# EAGLE board cRIO Breakout (EAGLE 5.11)
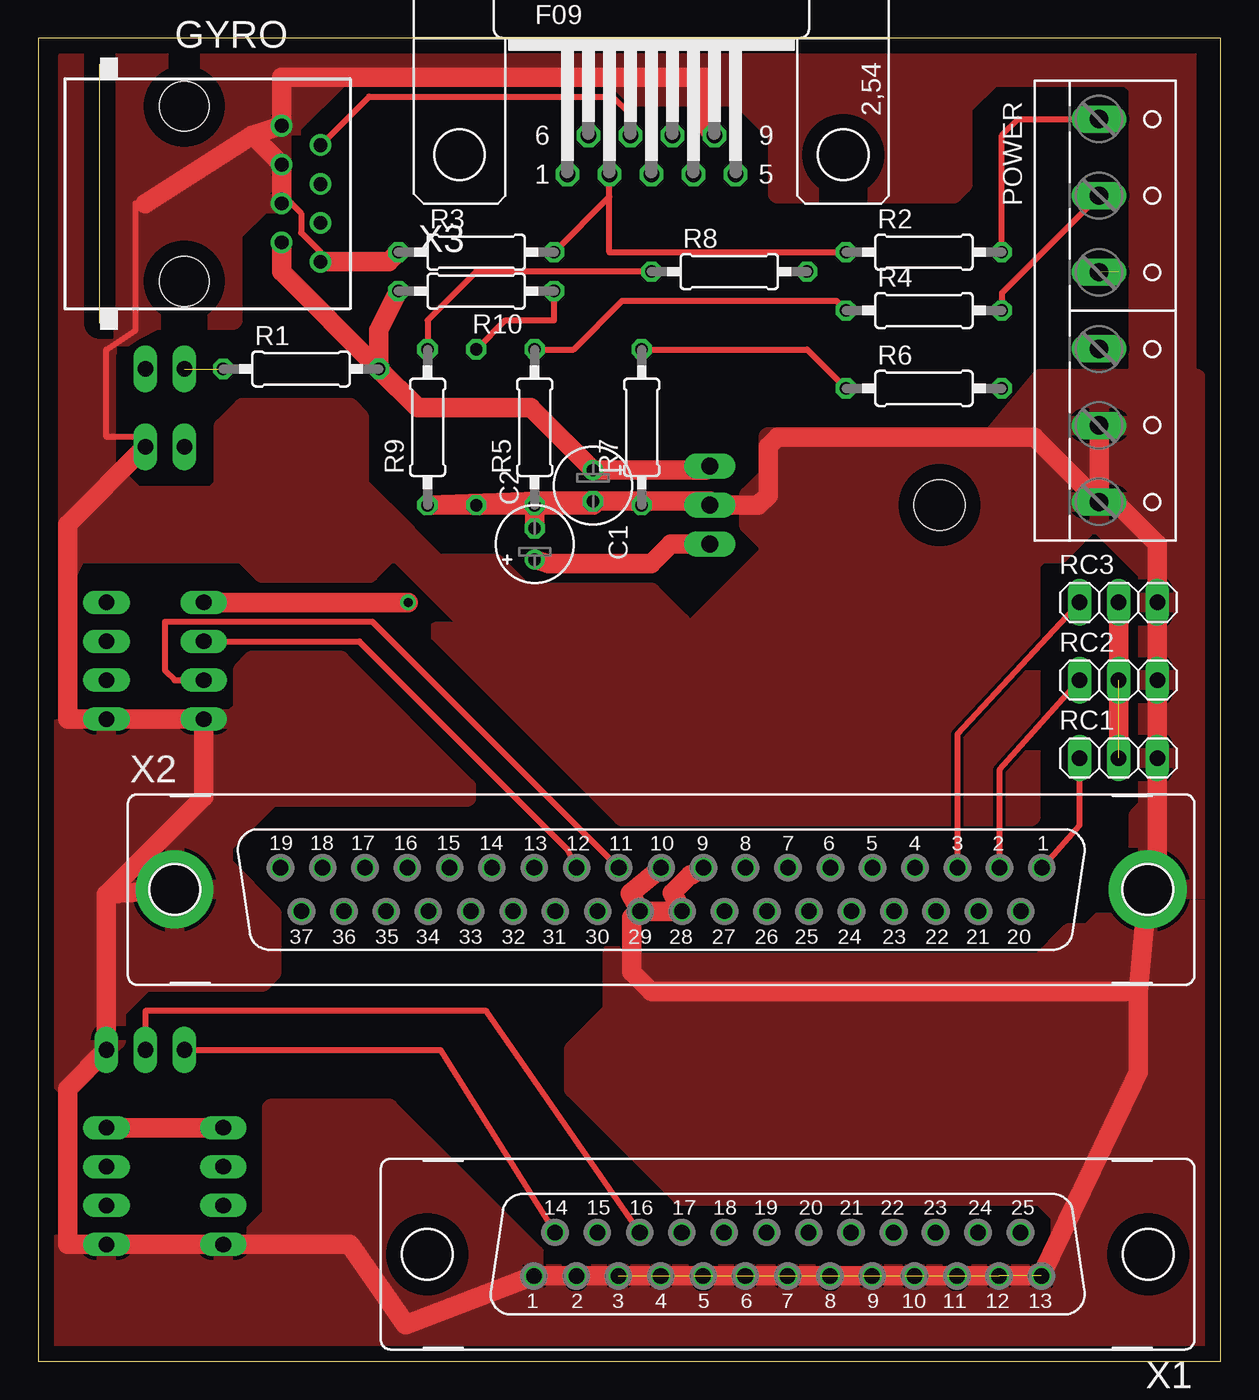
[diagram p0: board, top side]
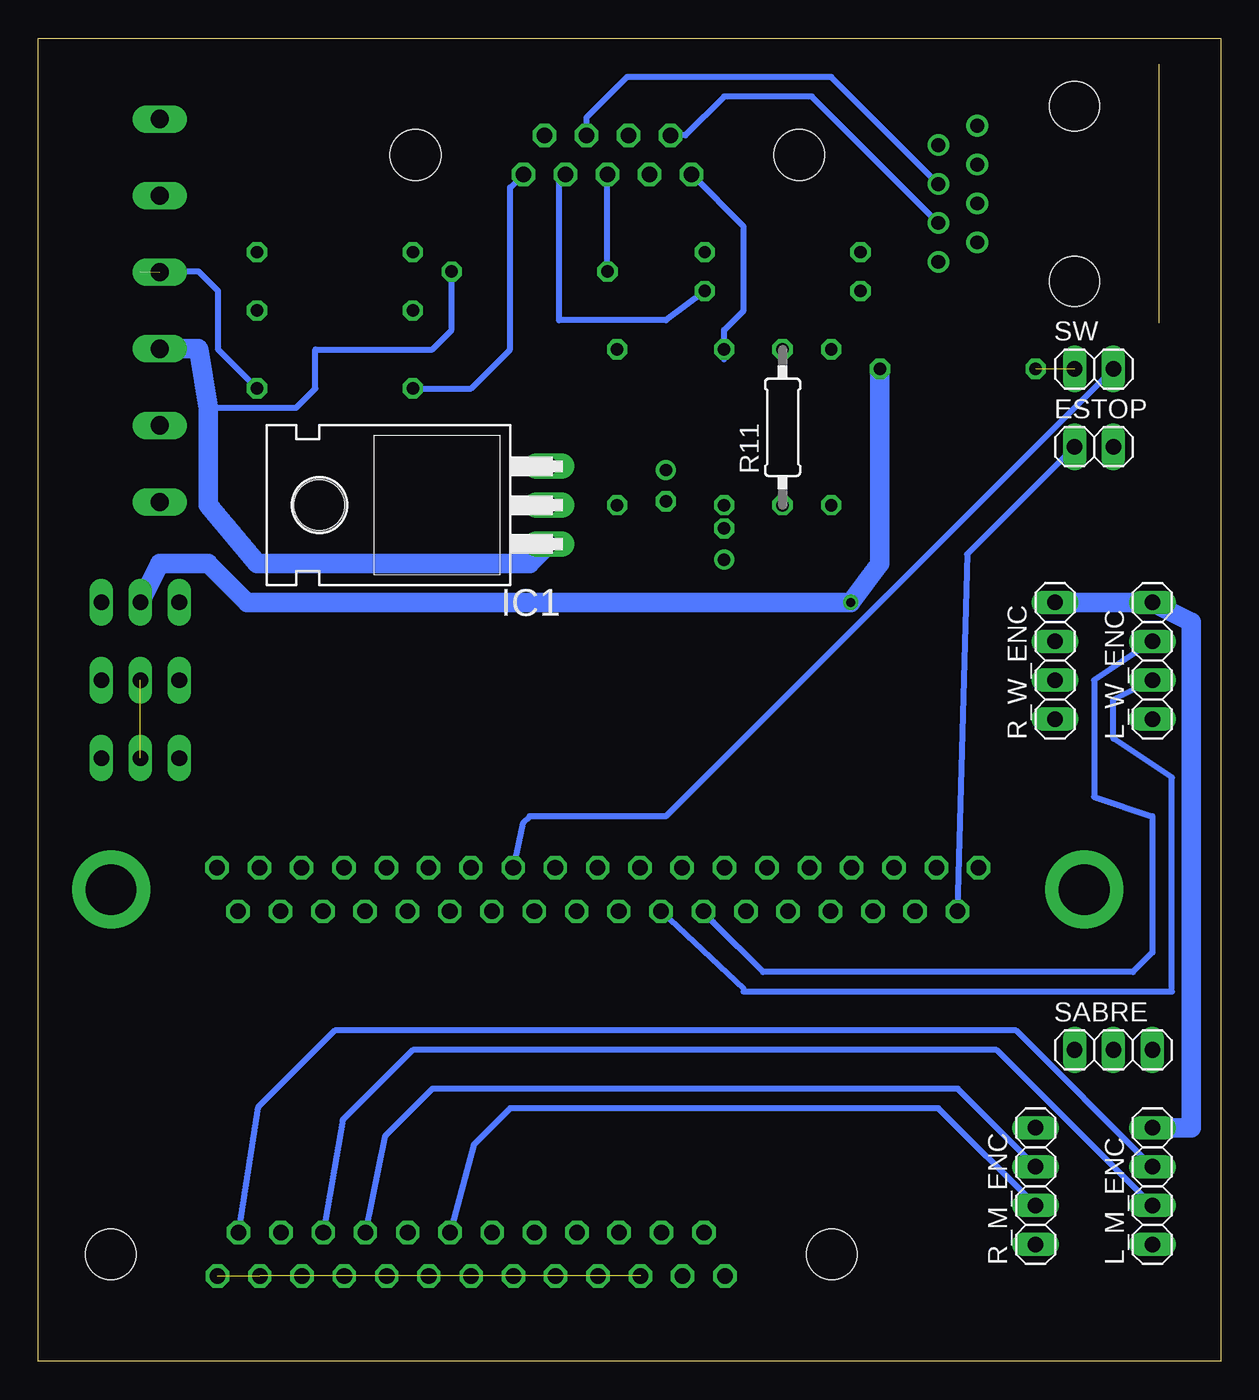
[diagram p1: board, bottom side, seen from below]

Size 77.14 x 86.35 mm. Coordinates in mm from the lower left corner, seen from the top.
Outline: 0,0 77.14,0 77.14,86.35 0,86.35 0,0
Copper layers (1*16): Top 0.035mm / dielectric 1.5mm / Bottom 0.035mm
Design rules "default *": minimum track width 10mil, minimum drill 0.5994mm, track to track 8mil, track to pad 8mil, pad to pad 8mil, via to via 8mil, smd to smd 0mil, copper to edge 40mil, drill to drill 8mil, minimum pad ring 10mil, minimum via ring 8mil, stop-mask expansion 4mil, vias tented up to drill 0mil, thermal gap 10mil

## Footprints (pad centres in the part's own frame; a part is rotated, then mirrored left to right if it is on the bottom)
E2-5 = drill 0.813 pad 1.27 round: + -1.016,0 | drill 0.813 pad 1.27 octagon: - 1.016,0
1X02 = drill 1.016 long: 1 -1.27,0; 2 1.27,0
RJ45-NO-SHIELD = drill 0.9 pad 1.4 round: 1 -4.445,6.35; 2 -3.175,8.89; 3 -1.905,6.35; 4 -0.635,8.89; 5 0.635,6.35; 6 1.905,8.89; 7 3.175,6.35; 8 4.445,8.89 | hole 3.251: -5.715,0; 5.715,0
TO220H = drill 1.118 long: 1 -2.54,-10.16; 2 0,-10.16; 3 2.54,-10.16 | hole 3.302: 0,4.826
1X04 = drill 1.016 long: 1 -3.81,0; 2 -1.27,0; 3 1.27,0; 4 3.81,0
W237-6 = drill 1.194 long: 1 -12.5,-1.27; 2 -7.5,-1.27; 3 -2.5,-1.27; 4 2.5,-1.27; 5 7.5,-1.27; 6 12.5,-1.27
0207/10 = drill 0.813 octagon: 1 -5.08,0; 2 5.08,0
1X03 = drill 1.016 long: 1 -2.54,0; 2 0,0; 3 2.54,0
F25V = drill 1.016 octagon: 1 16.561,1.422; 2 13.792,1.422; 3 11.049,1.422; 4 8.28,1.422; 5 5.512,1.422; 6 2.769,1.422; 7 0,1.422; 8 -2.769,1.422; 9 -5.512,1.422; 10 -8.28,1.422; 11 -11.049,1.422; 12 -13.792,1.422; 13 -16.561,1.422; 14 15.189,-1.422; 15 12.421,-1.422; 16 9.652,-1.422; 17 6.909,-1.422; 18 4.14,-1.422; 19 1.372,-1.422; 20 -1.372,-1.422; 21 -4.14,-1.422; 22 -6.909,-1.422; 23 -9.652,-1.422; 24 -12.421,-1.422; 25 -15.189,-1.422 | hole 3.302: 23.52,0; -23.52,0
F37VP = drill 1.016 octagon: 1 24.841,1.422; 2 22.073,1.422; 3 19.329,1.422; 4 16.561,1.422; 5 13.792,1.422; 6 11.049,1.422; 7 8.28,1.422; 8 5.512,1.422; 9 2.769,1.422; 10 0,1.422; 11 -2.769,1.422; 12 -5.512,1.422; 13 -8.28,1.422; 14 -11.049,1.422; 15 -13.818,1.422; 16 -16.561,1.422; 17 -19.329,1.422; 18 -22.098,1.422; 19 -24.841,1.422; 20 23.47,-1.422; 21 20.701,-1.422; 22 17.932,-1.422; 23 15.189,-1.422; 24 12.421,-1.422; 25 9.652,-1.422; 26 6.909,-1.422; 27 4.14,-1.422; 28 1.372,-1.422; 29 -1.372,-1.422; 30 -4.14,-1.422; 31 -6.909,-1.422; 32 -9.677,-1.422; 33 -12.421,-1.422; 34 -15.189,-1.422; 35 -17.958,-1.422; 36 -20.701,-1.422; 37 -23.47,-1.422 | drill 3.302 pad 5.08 round: G1 -31.75,0; G2 31.75,0
F09H = drill 1.016 octagon: 1 -5.486,-1.27; 2 -2.743,-1.27; 3 0,-1.27; 4 2.743,-1.27; 5 5.486,-1.27; 6 -4.115,1.27; 7 -1.372,1.27; 8 1.372,1.27; 9 4.115,1.27 | hole 3.302: -12.522,0; 12.522,0

## Placement (x,y rotation side)
C1  10u  [E2-5]  36.2,57.15 270 top
C2  10u  [E2-5]  32.38,53.34 90 top
ESTOP  [1X02]  8.26,59.69 0 bottom
GYRO  RJ45-8L-B  [RJ45-NO-SHIELD]  9.53,76.2 270 top
IC1  7805T  [TO220H]  53.98,55.88 90 bottom
L_M_ENC  [1X04]  4.45,11.43 90 bottom
L_W_ENC  [1X04]  4.45,45.72 90 bottom
POWER  [W237-6]  70.48,68.58 270 top
R1  10k  [0207/10]  17.15,64.77 0 top
R2  100k  [0207/10]  57.78,72.39 0 top
R3  33k  [0207/10]  28.58,72.39 0 top
R4  100k  [0207/10]  57.78,68.58 0 top
R5  33k  [0207/10]  32.38,60.96 90 top
R6  100k  [0207/10]  57.78,63.5 0 top
R7  33k  [0207/10]  39.37,60.96 90 top
R8  100k  [0207/10]  45.09,71.12 0 top
R9  33k  [0207/10]  25.4,60.96 90 top
R10  100k  [0207/10]  28.58,69.85 180 top
R11  33k  [0207/10]  28.58,60.96 90 bottom
R_M_ENC  [1X04]  12.06,11.43 90 bottom
R_W_ENC  [1X04]  10.79,45.72 90 bottom
RC1  [1X03]  70.48,39.37 0 top
RC2  [1X03]  70.48,44.45 0 top
RC3  [1X03]  70.48,49.53 0 top
SABRE  [1X03]  6.98,20.32 0 bottom
SW  [1X02]  8.26,64.77 0 bottom
X1  [F25V]  48.89,6.99 180 top
X2  [F37VP]  40.64,30.78 0 top
X3  [F09H]  40,78.74 0 top

## Library data of the parts
C1 C2 R1-R11 = resistor
ESTOP L_M_ENC L_W_ENC R_M_ENC R_W_ENC RC1-RC3 SABRE SW = pinhead
GYRO = con-tycoelectronics; MF: TYCO ELECTRONICS; MPN: RJ45-8L-B; OC_FARNELL: 1279843; OC_NEWARK: 52K4445
IC1 = linear
POWER = con-wago-500; OC_FARNELL: unknown; OC_NEWARK: unknown
X1-X3 = con-subd; OC_FARNELL: unknown; OC_NEWARK: unknown

## Nets
+5V: C1.+ GYRO.7 IC1.3 L_M_ENC.4 L_W_ENC.4 R1.2 R10.2 R_M_ENC.4 R_W_ENC.4 RC1.2 RC2.2 RC3.2
+12V: C2.+ IC1.1 POWER.4 R8.2
+24V: POWER.1 R2.2
GND: C1.- C2.- ESTOP.2 GYRO.1 GYRO.3 GYRO.5 GYRO.8 IC1.2 L_M_ENC.1 L_W_ENC.1 POWER.5 POWER.6 R3.1 R5.1 R7.1 R9.1 R11.1 R_M_ENC.1 R_W_ENC.1 RC1.3 RC2.3 RC3.3 SABRE.3 X1.1 X1.3 X1.4 X1.6 X1.7 X1.9 X1.10 X1.12 X1.13 X2.9 X2.10 X2.28 X2.29 X2.G1 X2.G2 X3.9
N$1: RC1.1 X2.1
N$2: RC2.1 X2.2
N$3: RC3.1 X2.3
N$4: R_W_ENC.2 X2.11
N$5: SW.2 X2.8
N$6: R_W_ENC.3 X2.12
N$7: L_W_ENC.2 X2.30
N$8: L_W_ENC.3 X2.31
N$9: ESTOP.1 X2.37
N$10: R1.1 SW.1
N$11: SABRE.1 X1.14
N$12: SABRE.2 X1.16
N$13: R_M_ENC.2 X1.20
N$14: R_M_ENC.3 X1.22
N$15: R6.1 R7.2 X3.5
N$16: GYRO.6 X3.6
N$17: L_M_ENC.2 X1.23
N$18: L_M_ENC.3 X1.25
N$19: GYRO.2 X3.7
N$20: R2.1 R3.2 X3.2
N$21: R4.1 R5.2 X3.1
N$23: GYRO.4 X3.8
N$24: R10.1 R11.2 X3.4
N$26: R8.1 R9.2 X3.3
V+: POWER.3 R6.2
VCC: POWER.2 R4.2

## Tracks (layer width: path | path; a pad name or v marks a point on that pad's centre or on a via)
+5V  (via drill 0.6)  (1 unrouted)
  Top 1.27: RC3.2 RC1.2 | L_M_ENC.4 R_M_ENC.4 | IC1.3 43.56,58.17 C1.+ 32.13,62.23 24.77,62.23 R1.2 | R1.2 15.88,71.12 GYRO.7 | R1.2 22.23,67.31 R10.2 | R_W_ENC.4 v24.13,49.53
  Bottom 1.27: R_W_ENC.4 L_W_ENC.4 1.91,48.26 1.91,15.24 L_M_ENC.4 | RC3.2 69.22,52.07 66.04,52.07 63.5,49.53 v24.13,49.53 22.23,52.07 R1.2
+12V
  Top 1.27: C2.+ 33.27,52.07 40,52.07 41.27,53.34 IC1.1
  Bottom 0.406: R8.2 50.16,67.31 51.43,66.04 59.05,66.04 59.05,63.5 60.32,62.23 66.04,62.23
  Bottom 1.27: IC1.1 45.09,52.07 62.86,52.07 66.04,55.88 66.04,62.23 66.68,66.04 66.72,66.08 POWER.4
+24V
  Top 0.406: R2.2 62.86,80.01 63.93,81.08 POWER.1
GND  (7 unrouted)
  Top 0.406: 15.88,76.2 17.15,74.93 17.15,73.66 18.42,72.39 GYRO.8 | 6.98,75.56 6.35,75.56 6.35,67.31 4.45,66.04 4.45,60.33 6.98,60.33 ESTOP.2
  Top 1.27: POWER.6 POWER.5 | 71.76,24.13 71.76,18.85 X1.13 X1.1 23.98,2.39 20.32,7.62 R_M_ENC.1 L_M_ENC.1 1.91,7.62 1.91,17.78 SABRE.3 4.45,30.48 | 71.76,24.13 X2.G2 73.03,31.75 RC1.3 RC2.3 RC3.3 73.03,53.34 70.29,56.08 POWER.6 | 4.45,30.48 X2.G1 | X2.10 38.63,30.53 X2.29 | X2.29 38.73,28.96 38.73,25.4 40,24.13 71.76,24.13 | X2.29 X2.28 41.38,30.58 42.54,31.75 42.62,31.75 X2.9 | 4.45,30.48 10.79,36.83 R_W_ENC.1 L_W_ENC.1 1.91,41.91 1.91,54.61 ESTOP.2 | IC1.2 43.81,56.13 C1.- | C1.- 36.2,55.88 R5.1 | R11.1 R5.1 | R11.1 R9.1 | R9.1 R5.1 | R5.1 C2.- | IC1.2 44.45,56.08 | 13.97,80.01 GYRO.3 15.88,76.2 GYRO.5 | 13.97,80.01 GYRO.1 15.88,83.82 43.81,83.82 43.81,80.31 X3.9 | 6.98,75.56 13.97,80.01 | R9.1 32.64,56.13 C1.- | R3.1 22.86,71.75 GYRO.8 | R11.1 33.91,56.13 C1.- | R7.1 39.75,56.13 C1.- | POWER.6 64.97,60.33 48.26,60.33 47.62,59.69 47.62,56.52 46.99,55.88 IC1.2
  pour Top (rank 5): 68.58,54.61 69.22,54.61 72.39,51.44 72.39,36.2 71.76,35.56 71.76,31.11 68.58,27.94 67.31,27.94 65.41,26.04 38.1,26.04 37.46,26.67 37.46,22.86 34.92,20.32 34.92,17.78 41.91,10.79 65.41,10.79 66.68,9.53 66.68,6.35 66.04,5.71 33.02,5.71 32.38,6.35 32.38,6.99 22.86,16.51 15.24,16.51 15.24,9.53 13.33,7.62 1.27,7.62 1.27,0.64 76.2,0.64 76.2,62.87 75.57,64.14 65.41,64.14 62.23,60.33 47.62,60.33 47.62,57.78 46.35,56.52 46.35,54.61 47.62,53.34 47.62,52.7 42.54,47.62 26.04,47.62 38.1,35.56 64.77,35.56 64.77,52.07 65.41,52.7 66.68,52.7
  pour Top (rank 5): 72.39,82.55 71.12,83.82 62.23,83.82 60.32,81.92 60.32,76.83 59.69,76.2 48.26,76.2 48.26,80.01 45.72,82.55 38.73,82.55 37.46,83.82 19.69,83.82 16.51,80.64 16.51,80.01 15.88,79.38 15.88,75.56 14.61,75.56 12.7,73.66 12.7,67.94 7.62,67.94 6.35,67.31 4.45,66.04 4.45,58.42 6.35,56.52 11.43,56.52 12.06,57.15 12.06,60.96 13.33,62.23 20.32,62.23 20.96,61.59 20.96,57.15 24.13,53.98 21.59,51.44 14.61,51.44 13.33,52.7 2.54,52.7 1.91,51.44 1.91,85.09 2.54,86.36 75.57,86.36 76.2,85.72
  pour Top (rank 5): 22.86,52.7 23.5,52.7 27.94,48.26 28.58,48.26 31.12,45.72 38.1,45.72 41.91,41.91 41.91,48.26 40,50.16 31.75,50.16 29.85,52.07 26.04,52.07 20.32,57.78 20.32,53.98 20.96,53.34 22.23,53.34
  pour Top (rank 5): 15.24,25.4 15.24,29.21 12.06,32.38 12.06,33.66 15.24,36.83 27.94,36.83 27.94,37.47 19.69,45.72 13.97,45.72 13.33,45.09 13.33,42.55 12.7,41.91 11.43,41.91 10.79,41.27 1.27,41.27 1.27,18.41 1.91,17.78 5.08,20.95 5.08,22.86 6.98,24.77 14.61,24.77
  pour Top (rank 5): 74.93,84.45 74.93,64.14 71.76,64.14 71.76,83.19 71.12,83.82 74.3,83.82
N$1
  Top 0.406: X2.1 67.95,35 RC1.1
N$2
  Top 0.406: RC2.1 62.71,38.58 X2.2
N$3
  Top 0.406: RC3.1 59.97,40.92 X2.3
N$4
  Top 0.406: X2.11 21.82,48.26 8.26,48.26 8.26,45.09 8.89,44.45 R_W_ENC.2
N$5
  Bottom 0.406: SW.2 36.2,35.56 45.09,35.56 45.52,35.13 X2.8
N$6
  Top 0.406: R_W_ENC.3 20.96,46.99 34.49,33.45 X2.12
N$7
  Bottom 0.406: X2.30 31.12,24.31 31.12,24.13 3.17,24.13 3.17,38.1 6.98,40.64 6.98,43.18 L_W_ENC.2
N$8
  Bottom 0.406: L_W_ENC.3 8.26,44.45 8.26,36.83 4.45,35.56 4.45,26.67 5.71,25.4 29.85,25.4 33.1,28.65 X2.31
N$9
  Bottom 0.406: ESTOP.1 16.54,52.68 X2.37
N$10  (1 unrouted)
N$11
  Top 0.406: X1.14 26.24,20.32 SABRE.1
N$12
  Top 0.406: X1.16 29.24,22.86 6.98,22.86 SABRE.2
N$13
  Bottom 0.406: R_M_ENC.2 18.42,16.51 46.35,16.51 48.74,14.12 X1.20
N$14
  Bottom 0.406: R_M_ENC.3 17.15,17.78 51.43,17.78 54.53,14.68 X1.22
N$15
  Top 0.406: R6.1 50.16,66.04 R7.2
  Bottom 0.406: X3.5 46.35,76.61 46.35,66.04 48.89,63.5 R6.1
N$16
  Bottom 0.406: GYRO.6 26.67,82.55 32.38,82.55 34.92,80.01 X3.6
N$17
  Bottom 0.406: L_M_ENC.2 14.61,20.32 52.7,20.32 57.28,15.75 X1.23
N$18
  Bottom 0.406: L_M_ENC.3 13.33,21.59 57.78,21.59 62.81,16.56 X1.25
N$19
  Top 0.406: GYRO.2 21.59,82.55 37.46,82.55 38.63,81.38 X3.7
N$20
  Top 0.406: R2.1 37.26,72.39 X3.2 37.26,76 R3.2
N$21
  Top 0.406: R4.1 52.07,69.22 38.1,69.22 34.92,66.04 R5.2
  Bottom 0.406: X3.1 31.12,74.07 31.12,68.58 32.38,67.31 R5.2 32.38,65.41
N$23
  Bottom 0.406: GYRO.4 25.4,83.82 38.73,83.82 41.38,81.18 X3.8
N$24
  Top 0.406: R11.2 30.48,67.94 33.66,67.94 R10.1
  Bottom 0.406: R10.1 36.2,67.94 43.18,67.94 43.18,77.04 X3.4
N$26
  Top 0.406: R8.1 28.58,71.12 25.4,67.94 R9.2
  Bottom 0.406: R8.1 X3.3
V+  (1 unrouted)
  Bottom 0.406: R6.2 65.41,66.04 65.41,69.85 66.68,71.12 70.48,71.12
VCC
  Top 0.406: POWER.2 62.86,69.73 R4.2